# EAGLE board Jogo Genius (EAGLE 9.7.0)

Size 221.77 x 96.82 mm. Coordinates in mm from the lower left corner, seen from the top.
Outline: 0,0 221.77,0 221.77,96.82 0,96.82 0,0
Copper layers (1*16): Top 0.035mm / dielectric 1.5mm / Bottom 0.035mm
Design rules "default": minimum track width 6mil, minimum drill 0.35mm, track to track 6mil, track to pad 6mil, pad to pad 6mil, via to via 6mil, smd to smd 6mil, copper to edge 40mil, drill to drill 6mil, minimum pad ring 10mil, minimum via ring 8mil, stop-mask expansion 4mil, vias tented up to drill 0mil, thermal gap 10mil

## Footprints (pad centres in the part's own frame; a part is rotated, then mirrored left to right if it is on the bottom)
LEDRD254W60D565H860B = drill 0.981 pad 1.581: 1 -1.27,0; 2 1.27,0
LEDRD254W60D565H860B_G = drill 0.981 pad 1.581: 1 -1.27,0; 2 1.27,0
LEDRD254W60D565H860B_Y = drill 0.981 pad 1.581: 1 -1.27,0; 2 1.27,0
LEDRD254W60D565H860B_B = drill 0.981 pad 1.581: 1 -1.27,0; 2 1.27,0
PIEZO = drill 1 pad 1.6: 1 -3.5,0; 2 3.5,0
SWITCH-MOMENTARY-PTH-6.5MM = drill 1.016 pad 1.88: 1 -3.251,2.261; 2 3.251,2.261; 3 -3.251,-2.261; 4 3.251,-2.261
ARDUINO-UNO-R3-SHIELD = drill 1.016 pad 1.88: 3.3V 24.13,-2.54; 5V 24.13,0; A0 24.13,12.7; A1 24.13,15.24; A2 24.13,17.78; A3 24.13,20.32; A4 24.13,22.86; A5 24.13,25.4; AREF -24.13,-13.97; D2 -24.13,20.32; D3 -24.13,17.78; D4 -24.13,15.24; D5 -24.13,12.7; D6 -24.13,10.16; D7 -24.13,7.62; D8 -24.13,3.81; D9 -24.13,1.27; D10 -24.13,-1.27; D11 -24.13,-3.81; D12 -24.13,-6.35; D13 -24.13,-8.89; GND@0 24.13,2.54; GND@1 24.13,5.08; GND@2 -24.13,-11.43; IOREF 24.13,-7.62; NC 24.13,-10.16; RES 24.13,-5.08; RX -24.13,25.4; SCL -24.13,-19.05; SDA -24.13,-16.51; TX -24.13,22.86; VIN 24.13,7.62

## Placement (x,y rotation side)
D1  RED  [LEDRD254W60D565H860B]  158.9,33.89 180 top
D2  GREEN  [LEDRD254W60D565H860B_G]  158.9,18.65 180 top
D3  YELLOW  [LEDRD254W60D565H860B_Y]  204.62,33.89 180 top
D4  BLUE  [LEDRD254W60D565H860B_B]  204.62,18.65 180 top
PIEZO1  PIEZO  [PIEZO]  181.76,23.73 0 top
S1  SWITCH_MOMENTARY  [SWITCH-MOMENTARY-PTH-6.5MM]  8.26,89.45 90 top
SBUTTONBLUE  SWITCH_MOMENTARY  [SWITCH-MOMENTARY-PTH-6.5MM]  213.51,19.92 90 top
SBUTTONGREEN  SWITCH_MOMENTARY  [SWITCH-MOMENTARY-PTH-6.5MM]  150.01,19.92 90 top
SBUTTONRED  SWITCH_MOMENTARY  [SWITCH-MOMENTARY-PTH-6.5MM]  150.01,37.7 90 top
SBUTTONYELLOW  SWITCH_MOMENTARY  [SWITCH-MOMENTARY-PTH-6.5MM]  213.51,37.7 90 top
U1  ARDUINO-UNO-R3-SHIELD  [ARDUINO-UNO-R3-SHIELD]  101.9,29.84 270 top

## Library data of the parts
D1 = Tinkercad; CATEGORY: Opto-Electronic; SUB-CATEGORY: LED; VALUE: LED_RED
D2 = Tinkercad; CATEGORY: Opto-Electronic; SUB-CATEGORY: LED; VALUE: LED_GREEN
D3 = Tinkercad; CATEGORY: Opto-Electronic; SUB-CATEGORY: LED; VALUE: LED_YELLOW
D4 = Tinkercad; CATEGORY: Opto-Electronic; SUB-CATEGORY: LED; VALUE: LED_BLUE
PIEZO1 S1 SBUTTONBLUE SBUTTONGREEN SBUTTONRED SBUTTONYELLOW U1 = Tinkercad

## Nets
U1_D2: D1.1 U1.D2
U1_D3: D2.1 U1.D3
U1_D4: D4.1 U1.D4
U1_D5: D3.1 U1.D5
U1_D7: PIEZO1.1 U1.D7
U1_D8: SBUTTONYELLOW.1 SBUTTONYELLOW.2 U1.D8
U1_D9: SBUTTONRED.1 SBUTTONRED.2 U1.D9
U1_D10: SBUTTONBLUE.1 SBUTTONBLUE.2 U1.D10
U1_D11: SBUTTONGREEN.1 SBUTTONGREEN.2 U1.D11
U1_GND: D1.2 D2.2 D3.2 D4.2 PIEZO1.2 SBUTTONBLUE.3 SBUTTONBLUE.4 SBUTTONGREEN.3 SBUTTONGREEN.4 SBUTTONRED.3 SBUTTONRED.4 SBUTTONYELLOW.3 SBUTTONYELLOW.4 U1.GND@0 U1.GND@1 U1.GND@2

## Tracks (layer width: path | path; a pad name or v marks a point on that pad's centre or on a via)
U1_D2  (1 unrouted)
U1_D3  (1 unrouted)
U1_D4  (1 unrouted)
U1_D5  (1 unrouted)
U1_D7  (1 unrouted)
U1_D8  (2 unrouted)
U1_D9  (2 unrouted)
U1_D10  (2 unrouted)
U1_D11  (2 unrouted)
U1_GND  (15 unrouted)